# EAGLE board Digital_Temperature_Sensor_Breakout_-_TMP102_Panel_v13 (EAGLE 7.5.0), part 1 of 4
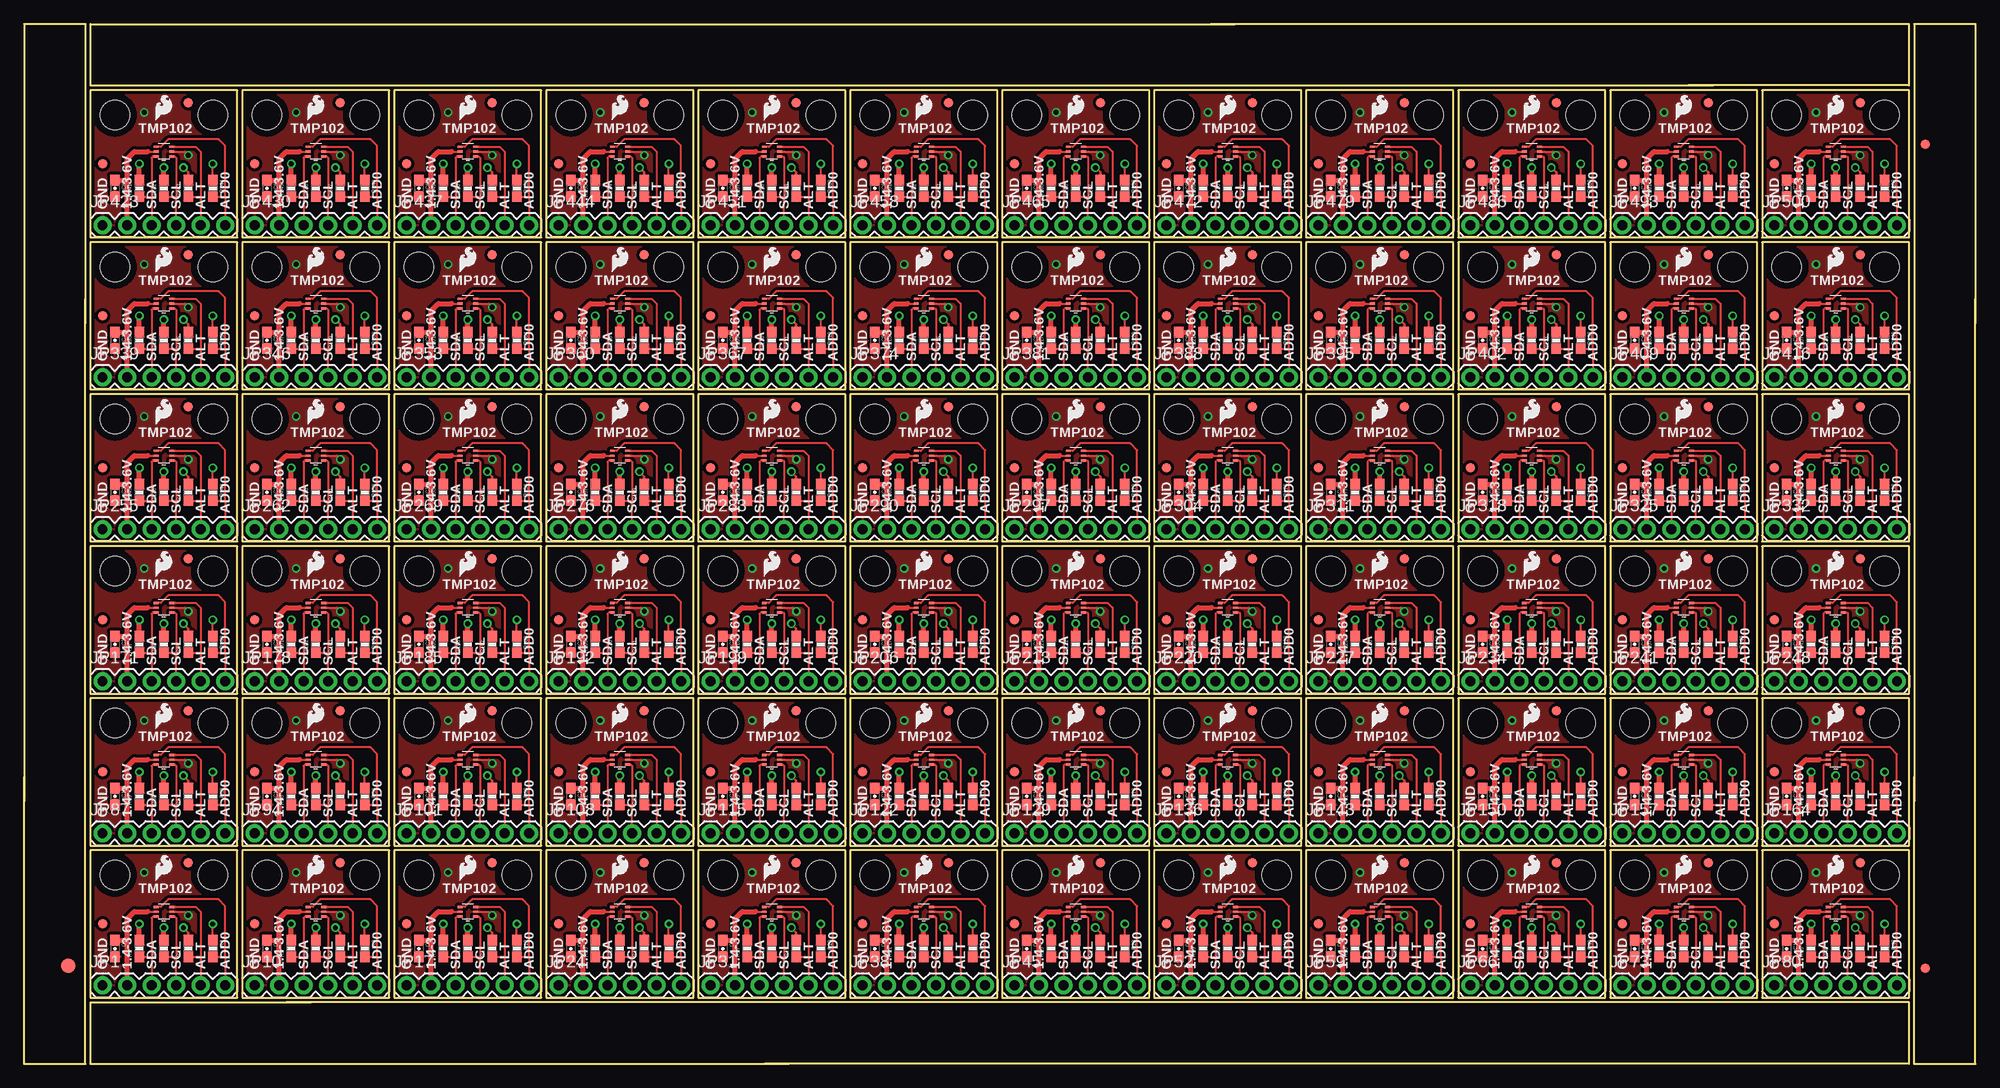
[diagram p0: board, top side]
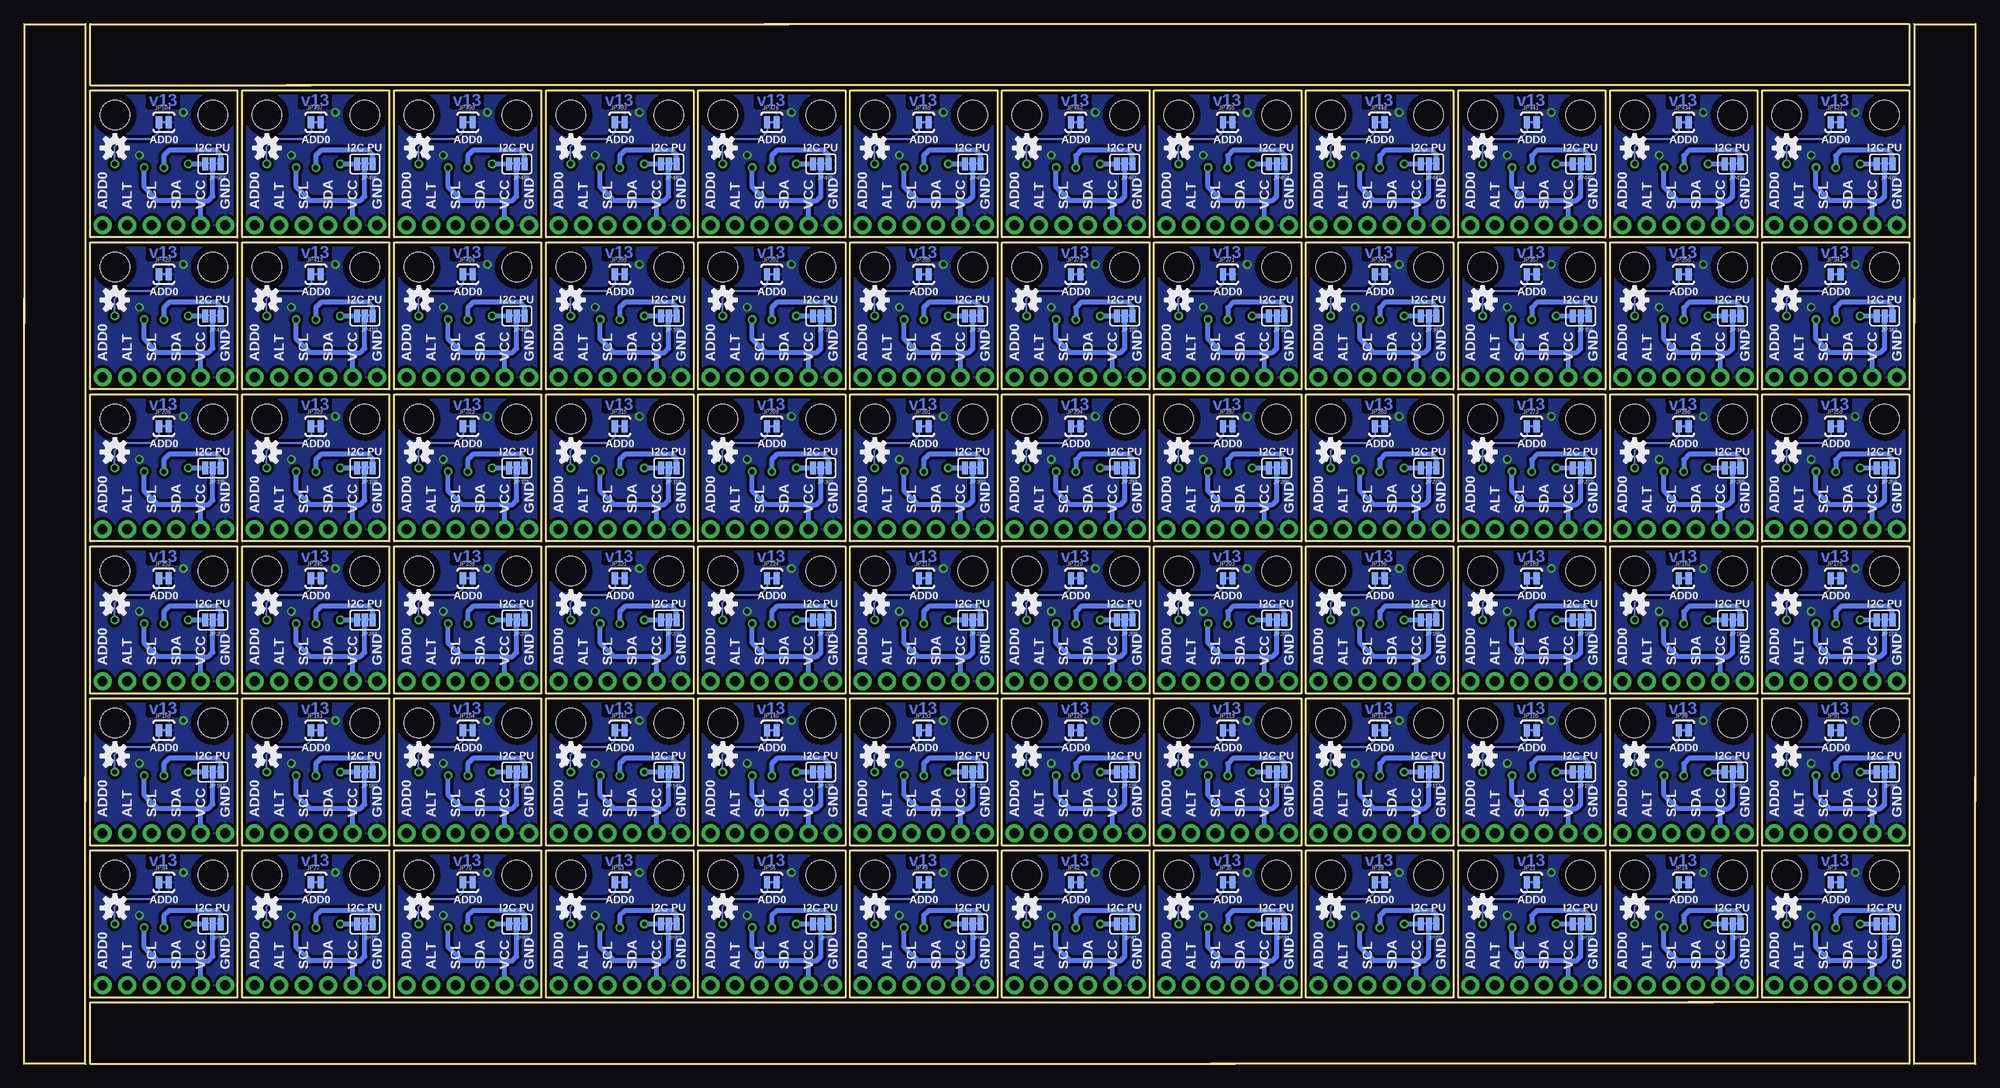
[diagram p1: board, bottom side, seen from below]

Size 202.18 x 107.7 mm. Coordinates in mm from the lower left corner, seen from the top.
Outline: 312 segments
Copper layers (1*16): Top 0.035mm / dielectric 1.5mm / Bottom 0.035mm
Design rules "SparkFun-2-layer-TIGHT": minimum track width 7mil, minimum drill 15mil, track to track 7mil, track to pad 7mil, pad to pad 7mil, via to via 7mil, smd to smd 7mil, copper to edge 7mil, drill to drill 7mil, minimum pad ring 7mil, minimum via ring 7mil, stop-mask expansion 4mil, vias tented up to drill 25mil, thermal gap 10mil

## Footprints (pad centres in the part's own frame; a part is rotated, then mirrored left to right if it is on the bottom)
0603-CAP = smd 1.1 x 1: 1 -0.85,0; 2 0.85,0
FIDUCIAL-1.5X3 = smd 1.5 x 1.5: 1 0,0
FIDUCIAL-1X2 = smd 1 x 1: 1 0,0
1X06 = drill 1.016 pad 1.88: 1 0,0; 2 2.54,0; 3 5.08,0; 4 7.62,0; 5 10.16,0; 6 12.7,0
PAD-JUMPER-3-3OF3_NC_BY_TRACE_YES_SILK_FULL_BOX = smd 0.635 x 1.27: 1 -0.813,0; 2 0,0; 3 0.813,0
PAD-JUMPER-2-NC_BY_TRACE_YES_SILK = smd 0.635 x 1.27: 1 -0.508,0; 2 0.508,0
STAND-OFF-TIGHT = hole 3.048: 0,0
0603-RES = smd 1.1 x 1: 1 -0.85,0; 2 0.85,0
SOT563-2 = smd 0.508 x 0.249: 1 -0.8,0.498; 2 -0.8,0.003; 3 -0.8,-0.506; 4 0.776,-0.506; 5 0.776,0.003; 6 0.776,0.498

## Placement (x,y rotation side)
C1  0.1uF  [0603-CAP]  9.4,11.94 270 top
C2  0.1uF  [0603-CAP]  25.15,11.94 270 top
C3  0.1uF  [0603-CAP]  40.89,11.94 270 top
C4  0.1uF  [0603-CAP]  56.64,11.94 270 top
C5  0.1uF  [0603-CAP]  72.39,11.94 270 top
C6  0.1uF  [0603-CAP]  88.14,11.94 270 top
C7  0.1uF  [0603-CAP]  103.89,11.94 270 top
C8  0.1uF  [0603-CAP]  119.63,11.94 270 top
C9  0.1uF  [0603-CAP]  135.38,11.94 270 top
C10  0.1uF  [0603-CAP]  151.13,11.94 270 top
C11  0.1uF  [0603-CAP]  166.88,11.94 270 top
C12  0.1uF  [0603-CAP]  182.63,11.94 270 top
C13  0.1uF  [0603-CAP]  9.4,27.69 270 top
C14  0.1uF  [0603-CAP]  25.15,27.69 270 top
C15  0.1uF  [0603-CAP]  40.89,27.69 270 top
C16  0.1uF  [0603-CAP]  56.64,27.69 270 top
C17  0.1uF  [0603-CAP]  72.39,27.69 270 top
C18  0.1uF  [0603-CAP]  88.14,27.69 270 top
C19  0.1uF  [0603-CAP]  103.89,27.69 270 top
C20  0.1uF  [0603-CAP]  119.63,27.69 270 top
C21  0.1uF  [0603-CAP]  135.38,27.69 270 top
C22  0.1uF  [0603-CAP]  151.13,27.69 270 top
C23  0.1uF  [0603-CAP]  166.88,27.69 270 top
C24  0.1uF  [0603-CAP]  182.63,27.69 270 top
C25  0.1uF  [0603-CAP]  9.4,43.43 270 top
C26  0.1uF  [0603-CAP]  25.15,43.43 270 top
C27  0.1uF  [0603-CAP]  40.89,43.43 270 top
C28  0.1uF  [0603-CAP]  56.64,43.43 270 top
C29  0.1uF  [0603-CAP]  72.39,43.43 270 top
C30  0.1uF  [0603-CAP]  88.14,43.43 270 top
C31  0.1uF  [0603-CAP]  103.89,43.43 270 top
C32  0.1uF  [0603-CAP]  119.63,43.43 270 top
C33  0.1uF  [0603-CAP]  135.38,43.43 270 top
C34  0.1uF  [0603-CAP]  151.13,43.43 270 top
C35  0.1uF  [0603-CAP]  166.88,43.43 270 top
C36  0.1uF  [0603-CAP]  182.63,43.43 270 top
C37  0.1uF  [0603-CAP]  9.4,59.18 270 top
C38  0.1uF  [0603-CAP]  25.15,59.18 270 top
C39  0.1uF  [0603-CAP]  40.89,59.18 270 top
C40  0.1uF  [0603-CAP]  56.64,59.18 270 top
C41  0.1uF  [0603-CAP]  72.39,59.18 270 top
C42  0.1uF  [0603-CAP]  88.14,59.18 270 top
C43  0.1uF  [0603-CAP]  103.89,59.18 270 top
C44  0.1uF  [0603-CAP]  119.63,59.18 270 top
C45  0.1uF  [0603-CAP]  135.38,59.18 270 top
C46  0.1uF  [0603-CAP]  151.13,59.18 270 top
C47  0.1uF  [0603-CAP]  166.88,59.18 270 top
C48  0.1uF  [0603-CAP]  182.63,59.18 270 top
C49  0.1uF  [0603-CAP]  9.4,74.93 270 top
C50  0.1uF  [0603-CAP]  25.15,74.93 270 top
C51  0.1uF  [0603-CAP]  40.89,74.93 270 top
C52  0.1uF  [0603-CAP]  56.64,74.93 270 top
C53  0.1uF  [0603-CAP]  72.39,74.93 270 top
C54  0.1uF  [0603-CAP]  88.14,74.93 270 top
C55  0.1uF  [0603-CAP]  103.89,74.93 270 top
C56  0.1uF  [0603-CAP]  119.63,74.93 270 top
C57  0.1uF  [0603-CAP]  135.38,74.93 270 top
C58  0.1uF  [0603-CAP]  151.13,74.93 270 top
C59  0.1uF  [0603-CAP]  166.88,74.93 270 top
C60  0.1uF  [0603-CAP]  182.63,74.93 270 top
C61  0.1uF  [0603-CAP]  9.4,90.68 270 top
C62  0.1uF  [0603-CAP]  25.15,90.68 270 top
C63  0.1uF  [0603-CAP]  40.89,90.68 270 top
C64  0.1uF  [0603-CAP]  56.64,90.68 270 top
C65  0.1uF  [0603-CAP]  72.39,90.68 270 top
C66  0.1uF  [0603-CAP]  88.14,90.68 270 top
C67  0.1uF  [0603-CAP]  103.89,90.68 270 top
C68  0.1uF  [0603-CAP]  119.63,90.68 270 top
C69  0.1uF  [0603-CAP]  135.38,90.68 270 top
C70  0.1uF  [0603-CAP]  151.13,90.68 270 top
C71  0.1uF  [0603-CAP]  166.88,90.68 270 top
C72  0.1uF  [0603-CAP]  182.63,90.68 270 top
E$1  [FIDUCIAL-1.5X3]  4.57,10.16 0 top
E$2  [FIDUCIAL-1X2]  196.98,95.25 0 top
E$5  [FIDUCIAL-1X2]  196.98,9.91 0 top
JP1  [1X06]  8.13,8.13 0 top
JP2  [PAD-JUMPER-3-3OF3_NC_BY_TRACE_YES_SILK_FULL_BOX]  9.4,14.48 180 bottom
JP3  ADD0  [PAD-JUMPER-2-NC_BY_TRACE_YES_SILK]  14.48,18.8 0 bottom
JP4  FIDUCIAL1X2  [FIDUCIAL-1X2]  23.88,14.48 0 top
JP5  FIDUCIAL1X2  [FIDUCIAL-1X2]  8.13,14.48 0 top
JP6  FIDUCIAL1X2  [FIDUCIAL-1X2]  17.02,20.83 0 top
JP7  STAND-OFFTIGHT  [STAND-OFF-TIGHT]  9.4,19.56 0 top
JP8  STAND-OFFTIGHT  [STAND-OFF-TIGHT]  19.56,19.56 0 top
JP9  FIDUCIAL1X2  [FIDUCIAL-1X2]  32.77,20.83 0 top
JP10  [1X06]  23.88,8.13 0 top
JP11  STAND-OFFTIGHT  [STAND-OFF-TIGHT]  25.15,19.56 0 top
JP12  STAND-OFFTIGHT  [STAND-OFF-TIGHT]  35.31,19.56 0 top
JP13  [PAD-JUMPER-3-3OF3_NC_BY_TRACE_YES_SILK_FULL_BOX]  25.15,14.48 180 bottom
JP14  ADD0  [PAD-JUMPER-2-NC_BY_TRACE_YES_SILK]  30.23,18.8 0 bottom
JP15  FIDUCIAL1X2  [FIDUCIAL-1X2]  39.62,14.48 0 top
JP16  FIDUCIAL1X2  [FIDUCIAL-1X2]  48.51,20.83 0 top
JP17  [1X06]  39.62,8.13 0 top
JP18  STAND-OFFTIGHT  [STAND-OFF-TIGHT]  40.89,19.56 0 top
JP19  STAND-OFFTIGHT  [STAND-OFF-TIGHT]  51.05,19.56 0 top
JP20  [PAD-JUMPER-3-3OF3_NC_BY_TRACE_YES_SILK_FULL_BOX]  40.89,14.48 180 bottom
JP21  ADD0  [PAD-JUMPER-2-NC_BY_TRACE_YES_SILK]  45.97,18.8 0 bottom
JP22  FIDUCIAL1X2  [FIDUCIAL-1X2]  55.37,14.48 0 top
JP23  FIDUCIAL1X2  [FIDUCIAL-1X2]  64.26,20.83 0 top
JP24  [1X06]  55.37,8.13 0 top
JP25  STAND-OFFTIGHT  [STAND-OFF-TIGHT]  56.64,19.56 0 top
JP26  STAND-OFFTIGHT  [STAND-OFF-TIGHT]  66.8,19.56 0 top
JP27  [PAD-JUMPER-3-3OF3_NC_BY_TRACE_YES_SILK_FULL_BOX]  56.64,14.48 180 bottom
JP28  ADD0  [PAD-JUMPER-2-NC_BY_TRACE_YES_SILK]  61.72,18.8 0 bottom
JP29  FIDUCIAL1X2  [FIDUCIAL-1X2]  71.12,14.48 0 top
JP30  FIDUCIAL1X2  [FIDUCIAL-1X2]  80.01,20.83 0 top
JP31  [1X06]  71.12,8.13 0 top
JP32  STAND-OFFTIGHT  [STAND-OFF-TIGHT]  72.39,19.56 0 top
JP33  STAND-OFFTIGHT  [STAND-OFF-TIGHT]  82.55,19.56 0 top
JP34  [PAD-JUMPER-3-3OF3_NC_BY_TRACE_YES_SILK_FULL_BOX]  72.39,14.48 180 bottom
JP35  ADD0  [PAD-JUMPER-2-NC_BY_TRACE_YES_SILK]  77.47,18.8 0 bottom
JP36  FIDUCIAL1X2  [FIDUCIAL-1X2]  86.87,14.48 0 top
JP37  FIDUCIAL1X2  [FIDUCIAL-1X2]  95.76,20.83 0 top
JP38  [1X06]  86.87,8.13 0 top
JP39  STAND-OFFTIGHT  [STAND-OFF-TIGHT]  88.14,19.56 0 top
JP40  STAND-OFFTIGHT  [STAND-OFF-TIGHT]  98.3,19.56 0 top
JP41  [PAD-JUMPER-3-3OF3_NC_BY_TRACE_YES_SILK_FULL_BOX]  88.14,14.48 180 bottom
JP42  ADD0  [PAD-JUMPER-2-NC_BY_TRACE_YES_SILK]  93.22,18.8 0 bottom
JP43  FIDUCIAL1X2  [FIDUCIAL-1X2]  102.62,14.48 0 top
JP44  FIDUCIAL1X2  [FIDUCIAL-1X2]  111.51,20.83 0 top
JP45  [1X06]  102.62,8.13 0 top
JP46  STAND-OFFTIGHT  [STAND-OFF-TIGHT]  103.89,19.56 0 top
JP47  STAND-OFFTIGHT  [STAND-OFF-TIGHT]  114.05,19.56 0 top
JP48  [PAD-JUMPER-3-3OF3_NC_BY_TRACE_YES_SILK_FULL_BOX]  103.89,14.48 180 bottom
JP49  ADD0  [PAD-JUMPER-2-NC_BY_TRACE_YES_SILK]  108.97,18.8 0 bottom
JP50  FIDUCIAL1X2  [FIDUCIAL-1X2]  118.36,14.48 0 top
JP51  FIDUCIAL1X2  [FIDUCIAL-1X2]  127.25,20.83 0 top
JP52  [1X06]  118.36,8.13 0 top
JP53  STAND-OFFTIGHT  [STAND-OFF-TIGHT]  119.63,19.56 0 top
JP54  STAND-OFFTIGHT  [STAND-OFF-TIGHT]  129.79,19.56 0 top
JP55  [PAD-JUMPER-3-3OF3_NC_BY_TRACE_YES_SILK_FULL_BOX]  119.63,14.48 180 bottom
JP56  ADD0  [PAD-JUMPER-2-NC_BY_TRACE_YES_SILK]  124.71,18.8 0 bottom
JP57  FIDUCIAL1X2  [FIDUCIAL-1X2]  134.11,14.48 0 top
JP58  FIDUCIAL1X2  [FIDUCIAL-1X2]  143,20.83 0 top
JP59  [1X06]  134.11,8.13 0 top
JP60  STAND-OFFTIGHT  [STAND-OFF-TIGHT]  135.38,19.56 0 top
JP61  STAND-OFFTIGHT  [STAND-OFF-TIGHT]  145.54,19.56 0 top
JP62  [PAD-JUMPER-3-3OF3_NC_BY_TRACE_YES_SILK_FULL_BOX]  135.38,14.48 180 bottom
JP63  ADD0  [PAD-JUMPER-2-NC_BY_TRACE_YES_SILK]  140.46,18.8 0 bottom
JP64  FIDUCIAL1X2  [FIDUCIAL-1X2]  149.86,14.48 0 top
JP65  FIDUCIAL1X2  [FIDUCIAL-1X2]  158.75,20.83 0 top
JP66  [1X06]  149.86,8.13 0 top
JP67  STAND-OFFTIGHT  [STAND-OFF-TIGHT]  151.13,19.56 0 top
JP68  STAND-OFFTIGHT  [STAND-OFF-TIGHT]  161.29,19.56 0 top
JP69  [PAD-JUMPER-3-3OF3_NC_BY_TRACE_YES_SILK_FULL_BOX]  151.13,14.48 180 bottom
JP70  ADD0  [PAD-JUMPER-2-NC_BY_TRACE_YES_SILK]  156.21,18.8 0 bottom
JP71  FIDUCIAL1X2  [FIDUCIAL-1X2]  165.61,14.48 0 top
JP72  FIDUCIAL1X2  [FIDUCIAL-1X2]  174.5,20.83 0 top
JP73  [1X06]  165.61,8.13 0 top
JP74  STAND-OFFTIGHT  [STAND-OFF-TIGHT]  166.88,19.56 0 top
JP75  STAND-OFFTIGHT  [STAND-OFF-TIGHT]  177.04,19.56 0 top
JP76  [PAD-JUMPER-3-3OF3_NC_BY_TRACE_YES_SILK_FULL_BOX]  166.88,14.48 180 bottom
JP77  ADD0  [PAD-JUMPER-2-NC_BY_TRACE_YES_SILK]  171.96,18.8 0 bottom
JP78  FIDUCIAL1X2  [FIDUCIAL-1X2]  181.36,14.48 0 top
JP79  FIDUCIAL1X2  [FIDUCIAL-1X2]  190.25,20.83 0 top
JP80  [1X06]  181.36,8.13 0 top
JP81  STAND-OFFTIGHT  [STAND-OFF-TIGHT]  182.63,19.56 0 top
JP82  STAND-OFFTIGHT  [STAND-OFF-TIGHT]  192.79,19.56 0 top
JP83  [PAD-JUMPER-3-3OF3_NC_BY_TRACE_YES_SILK_FULL_BOX]  182.63,14.48 180 bottom
JP84  ADD0  [PAD-JUMPER-2-NC_BY_TRACE_YES_SILK]  187.71,18.8 0 bottom
JP85  FIDUCIAL1X2  [FIDUCIAL-1X2]  8.13,30.23 0 top
JP86  FIDUCIAL1X2  [FIDUCIAL-1X2]  17.02,36.58 0 top
JP87  [1X06]  8.13,23.88 0 top
JP88  STAND-OFFTIGHT  [STAND-OFF-TIGHT]  9.4,35.31 0 top
JP89  STAND-OFFTIGHT  [STAND-OFF-TIGHT]  19.56,35.31 0 top
JP90  [PAD-JUMPER-3-3OF3_NC_BY_TRACE_YES_SILK_FULL_BOX]  9.4,30.23 180 bottom
JP91  ADD0  [PAD-JUMPER-2-NC_BY_TRACE_YES_SILK]  14.48,34.54 0 bottom
JP92  FIDUCIAL1X2  [FIDUCIAL-1X2]  23.88,30.23 0 top
JP93  FIDUCIAL1X2  [FIDUCIAL-1X2]  32.77,36.58 0 top
JP94  [1X06]  23.88,23.88 0 top
JP95  STAND-OFFTIGHT  [STAND-OFF-TIGHT]  25.15,35.31 0 top
JP96  STAND-OFFTIGHT  [STAND-OFF-TIGHT]  35.31,35.31 0 top
JP97  [PAD-JUMPER-3-3OF3_NC_BY_TRACE_YES_SILK_FULL_BOX]  25.15,30.23 180 bottom
JP98  ADD0  [PAD-JUMPER-2-NC_BY_TRACE_YES_SILK]  30.23,34.54 0 bottom
JP99  FIDUCIAL1X2  [FIDUCIAL-1X2]  39.62,30.23 0 top
JP100  FIDUCIAL1X2  [FIDUCIAL-1X2]  48.51,36.58 0 top
JP101  [1X06]  39.62,23.88 0 top
JP102  STAND-OFFTIGHT  [STAND-OFF-TIGHT]  40.89,35.31 0 top
JP103  STAND-OFFTIGHT  [STAND-OFF-TIGHT]  51.05,35.31 0 top
JP104  [PAD-JUMPER-3-3OF3_NC_BY_TRACE_YES_SILK_FULL_BOX]  40.89,30.23 180 bottom
JP105  ADD0  [PAD-JUMPER-2-NC_BY_TRACE_YES_SILK]  45.97,34.54 0 bottom
JP106  FIDUCIAL1X2  [FIDUCIAL-1X2]  55.37,30.23 0 top
JP107  FIDUCIAL1X2  [FIDUCIAL-1X2]  64.26,36.58 0 top
JP108  [1X06]  55.37,23.88 0 top
JP109  STAND-OFFTIGHT  [STAND-OFF-TIGHT]  56.64,35.31 0 top
JP110  STAND-OFFTIGHT  [STAND-OFF-TIGHT]  66.8,35.31 0 top
JP111  [PAD-JUMPER-3-3OF3_NC_BY_TRACE_YES_SILK_FULL_BOX]  56.64,30.23 180 bottom
JP112  ADD0  [PAD-JUMPER-2-NC_BY_TRACE_YES_SILK]  61.72,34.54 0 bottom
JP113  FIDUCIAL1X2  [FIDUCIAL-1X2]  71.12,30.23 0 top
JP114  FIDUCIAL1X2  [FIDUCIAL-1X2]  80.01,36.58 0 top
JP115  [1X06]  71.12,23.88 0 top
JP116  STAND-OFFTIGHT  [STAND-OFF-TIGHT]  72.39,35.31 0 top
JP117  STAND-OFFTIGHT  [STAND-OFF-TIGHT]  82.55,35.31 0 top
JP118  [PAD-JUMPER-3-3OF3_NC_BY_TRACE_YES_SILK_FULL_BOX]  72.39,30.23 180 bottom
JP119  ADD0  [PAD-JUMPER-2-NC_BY_TRACE_YES_SILK]  77.47,34.54 0 bottom
JP120  FIDUCIAL1X2  [FIDUCIAL-1X2]  86.87,30.23 0 top
JP121  FIDUCIAL1X2  [FIDUCIAL-1X2]  95.76,36.58 0 top
JP122  [1X06]  86.87,23.88 0 top
JP123  STAND-OFFTIGHT  [STAND-OFF-TIGHT]  88.14,35.31 0 top
JP124  STAND-OFFTIGHT  [STAND-OFF-TIGHT]  98.3,35.31 0 top
JP125  [PAD-JUMPER-3-3OF3_NC_BY_TRACE_YES_SILK_FULL_BOX]  88.14,30.23 180 bottom
JP126  ADD0  [PAD-JUMPER-2-NC_BY_TRACE_YES_SILK]  93.22,34.54 0 bottom
JP127  FIDUCIAL1X2  [FIDUCIAL-1X2]  102.62,30.23 0 top
JP128  FIDUCIAL1X2  [FIDUCIAL-1X2]  111.51,36.58 0 top
JP129  [1X06]  102.62,23.88 0 top
JP130  STAND-OFFTIGHT  [STAND-OFF-TIGHT]  103.89,35.31 0 top
JP131  STAND-OFFTIGHT  [STAND-OFF-TIGHT]  114.05,35.31 0 top
JP132  [PAD-JUMPER-3-3OF3_NC_BY_TRACE_YES_SILK_FULL_BOX]  103.89,30.23 180 bottom
JP133  ADD0  [PAD-JUMPER-2-NC_BY_TRACE_YES_SILK]  108.97,34.54 0 bottom
JP134  FIDUCIAL1X2  [FIDUCIAL-1X2]  118.36,30.23 0 top
JP135  FIDUCIAL1X2  [FIDUCIAL-1X2]  127.25,36.58 0 top
JP136  [1X06]  118.36,23.88 0 top
JP137  STAND-OFFTIGHT  [STAND-OFF-TIGHT]  119.63,35.31 0 top
JP138  STAND-OFFTIGHT  [STAND-OFF-TIGHT]  129.79,35.31 0 top
JP139  [PAD-JUMPER-3-3OF3_NC_BY_TRACE_YES_SILK_FULL_BOX]  119.63,30.23 180 bottom
JP140  ADD0  [PAD-JUMPER-2-NC_BY_TRACE_YES_SILK]  124.71,34.54 0 bottom
JP141  FIDUCIAL1X2  [FIDUCIAL-1X2]  134.11,30.23 0 top
JP142  FIDUCIAL1X2  [FIDUCIAL-1X2]  143,36.58 0 top
JP143  [1X06]  134.11,23.88 0 top
JP144  STAND-OFFTIGHT  [STAND-OFF-TIGHT]  135.38,35.31 0 top
JP145  STAND-OFFTIGHT  [STAND-OFF-TIGHT]  145.54,35.31 0 top
JP146  [PAD-JUMPER-3-3OF3_NC_BY_TRACE_YES_SILK_FULL_BOX]  135.38,30.23 180 bottom
JP147  ADD0  [PAD-JUMPER-2-NC_BY_TRACE_YES_SILK]  140.46,34.54 0 bottom
JP148  FIDUCIAL1X2  [FIDUCIAL-1X2]  149.86,30.23 0 top
JP149  FIDUCIAL1X2  [FIDUCIAL-1X2]  158.75,36.58 0 top
JP150  [1X06]  149.86,23.88 0 top
JP151  STAND-OFFTIGHT  [STAND-OFF-TIGHT]  151.13,35.31 0 top
JP152  STAND-OFFTIGHT  [STAND-OFF-TIGHT]  161.29,35.31 0 top
JP153  [PAD-JUMPER-3-3OF3_NC_BY_TRACE_YES_SILK_FULL_BOX]  151.13,30.23 180 bottom
JP154  ADD0  [PAD-JUMPER-2-NC_BY_TRACE_YES_SILK]  156.21,34.54 0 bottom
JP155  FIDUCIAL1X2  [FIDUCIAL-1X2]  165.61,30.23 0 top
JP156  FIDUCIAL1X2  [FIDUCIAL-1X2]  174.5,36.58 0 top
JP157  [1X06]  165.61,23.88 0 top
JP158  STAND-OFFTIGHT  [STAND-OFF-TIGHT]  166.88,35.31 0 top
JP159  STAND-OFFTIGHT  [STAND-OFF-TIGHT]  177.04,35.31 0 top
JP160  [PAD-JUMPER-3-3OF3_NC_BY_TRACE_YES_SILK_FULL_BOX]  166.88,30.23 180 bottom
JP161  ADD0  [PAD-JUMPER-2-NC_BY_TRACE_YES_SILK]  171.96,34.54 0 bottom
JP162  FIDUCIAL1X2  [FIDUCIAL-1X2]  181.36,30.23 0 top
JP163  FIDUCIAL1X2  [FIDUCIAL-1X2]  190.25,36.58 0 top
JP164  [1X06]  181.36,23.88 0 top
JP165  STAND-OFFTIGHT  [STAND-OFF-TIGHT]  182.63,35.31 0 top
JP166  STAND-OFFTIGHT  [STAND-OFF-TIGHT]  192.79,35.31 0 top
JP167  [PAD-JUMPER-3-3OF3_NC_BY_TRACE_YES_SILK_FULL_BOX]  182.63,30.23 180 bottom
JP168  ADD0  [PAD-JUMPER-2-NC_BY_TRACE_YES_SILK]  187.71,34.54 0 bottom
JP169  FIDUCIAL1X2  [FIDUCIAL-1X2]  8.13,45.97 0 top
JP170  FIDUCIAL1X2  [FIDUCIAL-1X2]  17.02,52.32 0 top
JP171  [1X06]  8.13,39.62 0 top
JP172  STAND-OFFTIGHT  [STAND-OFF-TIGHT]  9.4,51.05 0 top
JP173  STAND-OFFTIGHT  [STAND-OFF-TIGHT]  19.56,51.05 0 top
JP174  [PAD-JUMPER-3-3OF3_NC_BY_TRACE_YES_SILK_FULL_BOX]  9.4,45.97 180 bottom
JP175  ADD0  [PAD-JUMPER-2-NC_BY_TRACE_YES_SILK]  14.48,50.29 0 bottom
JP176  FIDUCIAL1X2  [FIDUCIAL-1X2]  23.88,45.97 0 top
JP177  FIDUCIAL1X2  [FIDUCIAL-1X2]  32.77,52.32 0 top
JP178  [1X06]  23.88,39.62 0 top
JP179  STAND-OFFTIGHT  [STAND-OFF-TIGHT]  25.15,51.05 0 top
JP180  STAND-OFFTIGHT  [STAND-OFF-TIGHT]  35.31,51.05 0 top
JP181  [PAD-JUMPER-3-3OF3_NC_BY_TRACE_YES_SILK_FULL_BOX]  25.15,45.97 180 bottom
JP182  ADD0  [PAD-JUMPER-2-NC_BY_TRACE_YES_SILK]  30.23,50.29 0 bottom
JP183  FIDUCIAL1X2  [FIDUCIAL-1X2]  39.62,45.97 0 top
JP184  FIDUCIAL1X2  [FIDUCIAL-1X2]  48.51,52.32 0 top
JP185  [1X06]  39.62,39.62 0 top
JP186  STAND-OFFTIGHT  [STAND-OFF-TIGHT]  40.89,51.05 0 top
JP187  STAND-OFFTIGHT  [STAND-OFF-TIGHT]  51.05,51.05 0 top
JP188  [PAD-JUMPER-3-3OF3_NC_BY_TRACE_YES_SILK_FULL_BOX]  40.89,45.97 180 bottom
JP189  ADD0  [PAD-JUMPER-2-NC_BY_TRACE_YES_SILK]  45.97,50.29 0 bottom
JP190  FIDUCIAL1X2  [FIDUCIAL-1X2]  55.37,45.97 0 top
JP191  FIDUCIAL1X2  [FIDUCIAL-1X2]  64.26,52.32 0 top
JP192  [1X06]  55.37,39.62 0 top
JP193  STAND-OFFTIGHT  [STAND-OFF-TIGHT]  56.64,51.05 0 top
JP194  STAND-OFFTIGHT  [STAND-OFF-TIGHT]  66.8,51.05 0 top
JP195  [PAD-JUMPER-3-3OF3_NC_BY_TRACE_YES_SILK_FULL_BOX]  56.64,45.97 180 bottom
JP196  ADD0  [PAD-JUMPER-2-NC_BY_TRACE_YES_SILK]  61.72,50.29 0 bottom
JP197  FIDUCIAL1X2  [FIDUCIAL-1X2]  71.12,45.97 0 top
JP198  FIDUCIAL1X2  [FIDUCIAL-1X2]  80.01,52.32 0 top
JP199  [1X06]  71.12,39.62 0 top
JP200  STAND-OFFTIGHT  [STAND-OFF-TIGHT]  72.39,51.05 0 top
JP201  STAND-OFFTIGHT  [STAND-OFF-TIGHT]  82.55,51.05 0 top
JP202  [PAD-JUMPER-3-3OF3_NC_BY_TRACE_YES_SILK_FULL_BOX]  72.39,45.97 180 bottom
JP203  ADD0  [PAD-JUMPER-2-NC_BY_TRACE_YES_SILK]  77.47,50.29 0 bottom
JP204  FIDUCIAL1X2  [FIDUCIAL-1X2]  86.87,45.97 0 top
JP205  FIDUCIAL1X2  [FIDUCIAL-1X2]  95.76,52.32 0 top
JP206  [1X06]  86.87,39.62 0 top
JP207  STAND-OFFTIGHT  [STAND-OFF-TIGHT]  88.14,51.05 0 top
JP208  STAND-OFFTIGHT  [STAND-OFF-TIGHT]  98.3,51.05 0 top
JP209  [PAD-JUMPER-3-3OF3_NC_BY_TRACE_YES_SILK_FULL_BOX]  88.14,45.97 180 bottom
JP210  ADD0  [PAD-JUMPER-2-NC_BY_TRACE_YES_SILK]  93.22,50.29 0 bottom
JP211  FIDUCIAL1X2  [FIDUCIAL-1X2]  102.62,45.97 0 top
JP212  FIDUCIAL1X2  [FIDUCIAL-1X2]  111.51,52.32 0 top
JP213  [1X06]  102.62,39.62 0 top
JP214  STAND-OFFTIGHT  [STAND-OFF-TIGHT]  103.89,51.05 0 top
JP215  STAND-OFFTIGHT  [STAND-OFF-TIGHT]  114.05,51.05 0 top
JP216  [PAD-JUMPER-3-3OF3_NC_BY_TRACE_YES_SILK_FULL_BOX]  103.89,45.97 180 bottom
JP217  ADD0  [PAD-JUMPER-2-NC_BY_TRACE_YES_SILK]  108.97,50.29 0 bottom
JP218  FIDUCIAL1X2  [FIDUCIAL-1X2]  118.36,45.97 0 top
JP219  FIDUCIAL1X2  [FIDUCIAL-1X2]  127.25,52.32 0 top
JP220  [1X06]  118.36,39.62 0 top
JP221  STAND-OFFTIGHT  [STAND-OFF-TIGHT]  119.63,51.05 0 top
JP222  STAND-OFFTIGHT  [STAND-OFF-TIGHT]  129.79,51.05 0 top
JP223  [PAD-JUMPER-3-3OF3_NC_BY_TRACE_YES_SILK_FULL_BOX]  119.63,45.97 180 bottom
JP224  ADD0  [PAD-JUMPER-2-NC_BY_TRACE_YES_SILK]  124.71,50.29 0 bottom
JP225  FIDUCIAL1X2  [FIDUCIAL-1X2]  134.11,45.97 0 top
JP226  FIDUCIAL1X2  [FIDUCIAL-1X2]  143,52.32 0 top
JP227  [1X06]  134.11,39.62 0 top
JP228  STAND-OFFTIGHT  [STAND-OFF-TIGHT]  135.38,51.05 0 top
JP229  STAND-OFFTIGHT  [STAND-OFF-TIGHT]  145.54,51.05 0 top
JP230  [PAD-JUMPER-3-3OF3_NC_BY_TRACE_YES_SILK_FULL_BOX]  135.38,45.97 180 bottom
JP231  ADD0  [PAD-JUMPER-2-NC_BY_TRACE_YES_SILK]  140.46,50.29 0 bottom
JP232  FIDUCIAL1X2  [FIDUCIAL-1X2]  149.86,45.97 0 top
JP233  FIDUCIAL1X2  [FIDUCIAL-1X2]  158.75,52.32 0 top
JP234  [1X06]  149.86,39.62 0 top
JP235  STAND-OFFTIGHT  [STAND-OFF-TIGHT]  151.13,51.05 0 top
JP236  STAND-OFFTIGHT  [STAND-OFF-TIGHT]  161.29,51.05 0 top
JP237  [PAD-JUMPER-3-3OF3_NC_BY_TRACE_YES_SILK_FULL_BOX]  151.13,45.97 180 bottom
JP238  ADD0  [PAD-JUMPER-2-NC_BY_TRACE_YES_SILK]  156.21,50.29 0 bottom
JP239  FIDUCIAL1X2  [FIDUCIAL-1X2]  165.61,45.97 0 top
JP240  FIDUCIAL1X2  [FIDUCIAL-1X2]  174.5,52.32 0 top
JP241  [1X06]  165.61,39.62 0 top
JP242  STAND-OFFTIGHT  [STAND-OFF-TIGHT]  166.88,51.05 0 top
JP243  STAND-OFFTIGHT  [STAND-OFF-TIGHT]  177.04,51.05 0 top
JP244  [PAD-JUMPER-3-3OF3_NC_BY_TRACE_YES_SILK_FULL_BOX]  166.88,45.97 180 bottom
JP245  ADD0  [PAD-JUMPER-2-NC_BY_TRACE_YES_SILK]  171.96,50.29 0 bottom
JP246  FIDUCIAL1X2  [FIDUCIAL-1X2]  181.36,45.97 0 top
JP247  FIDUCIAL1X2  [FIDUCIAL-1X2]  190.25,52.32 0 top
JP248  [1X06]  181.36,39.62 0 top
JP249  STAND-OFFTIGHT  [STAND-OFF-TIGHT]  182.63,51.05 0 top
JP250  STAND-OFFTIGHT  [STAND-OFF-TIGHT]  192.79,51.05 0 top
JP251  [PAD-JUMPER-3-3OF3_NC_BY_TRACE_YES_SILK_FULL_BOX]  182.63,45.97 180 bottom
JP252  ADD0  [PAD-JUMPER-2-NC_BY_TRACE_YES_SILK]  187.71,50.29 0 bottom
JP253  FIDUCIAL1X2  [FIDUCIAL-1X2]  8.13,61.72 0 top
JP254  FIDUCIAL1X2  [FIDUCIAL-1X2]  17.02,68.07 0 top
JP255  [1X06]  8.13,55.37 0 top
JP256  STAND-OFFTIGHT  [STAND-OFF-TIGHT]  9.4,66.8 0 top
JP257  STAND-OFFTIGHT  [STAND-OFF-TIGHT]  19.56,66.8 0 top
JP258  [PAD-JUMPER-3-3OF3_NC_BY_TRACE_YES_SILK_FULL_BOX]  9.4,61.72 180 bottom
JP259  ADD0  [PAD-JUMPER-2-NC_BY_TRACE_YES_SILK]  14.48,66.04 0 bottom
JP260  FIDUCIAL1X2  [FIDUCIAL-1X2]  23.88,61.72 0 top
JP261  FIDUCIAL1X2  [FIDUCIAL-1X2]  32.77,68.07 0 top
JP262  [1X06]  23.88,55.37 0 top
JP263  STAND-OFFTIGHT  [STAND-OFF-TIGHT]  25.15,66.8 0 top
JP264  STAND-OFFTIGHT  [STAND-OFF-TIGHT]  35.31,66.8 0 top
JP265  [PAD-JUMPER-3-3OF3_NC_BY_TRACE_YES_SILK_FULL_BOX]  25.15,61.72 180 bottom
JP266  ADD0  [PAD-JUMPER-2-NC_BY_TRACE_YES_SILK]  30.23,66.04 0 bottom
JP267  FIDUCIAL1X2  [FIDUCIAL-1X2]  39.62,61.72 0 top
JP268  FIDUCIAL1X2  [FIDUCIAL-1X2]  48.51,68.07 0 top
JP269  [1X06]  39.62,55.37 0 top
JP270  STAND-OFFTIGHT  [STAND-OFF-TIGHT]  40.89,66.8 0 top
JP271  STAND-OFFTIGHT  [STAND-OFF-TIGHT]  51.05,66.8 0 top
JP272  [PAD-JUMPER-3-3OF3_NC_BY_TRACE_YES_SILK_FULL_BOX]  40.89,61.72 180 bottom
JP273  ADD0  [PAD-JUMPER-2-NC_BY_TRACE_YES_SILK]  45.97,66.04 0 bottom
JP274  FIDUCIAL1X2  [FIDUCIAL-1X2]  55.37,61.72 0 top
JP275  FIDUCIAL1X2  [FIDUCIAL-1X2]  64.26,68.07 0 top
JP276  [1X06]  55.37,55.37 0 top
JP277  STAND-OFFTIGHT  [STAND-OFF-TIGHT]  56.64,66.8 0 top
JP278  STAND-OFFTIGHT  [STAND-OFF-TIGHT]  66.8,66.8 0 top
JP279  [PAD-JUMPER-3-3OF3_NC_BY_TRACE_YES_SILK_FULL_BOX]  56.64,61.72 180 bottom
JP280  ADD0  [PAD-JUMPER-2-NC_BY_TRACE_YES_SILK]  61.72,66.04 0 bottom
JP281  FIDUCIAL1X2  [FIDUCIAL-1X2]  71.12,61.72 0 top
JP282  FIDUCIAL1X2  [FIDUCIAL-1X2]  80.01,68.07 0 top
JP283  [1X06]  71.12,55.37 0 top
JP284  STAND-OFFTIGHT  [STAND-OFF-TIGHT]  72.39,66.8 0 top
JP285  STAND-OFFTIGHT  [STAND-OFF-TIGHT]  82.55,66.8 0 top
JP286  [PAD-JUMPER-3-3OF3_NC_BY_TRACE_YES_SILK_FULL_BOX]  72.39,61.72 180 bottom
JP287  ADD0  [PAD-JUMPER-2-NC_BY_TRACE_YES_SILK]  77.47,66.04 0 bottom
JP288  FIDUCIAL1X2  [FIDUCIAL-1X2]  86.87,61.72 0 top
JP289  FIDUCIAL1X2  [FIDUCIAL-1X2]  95.76,68.07 0 top
JP290  [1X06]  86.87,55.37 0 top
JP291  STAND-OFFTIGHT  [STAND-OFF-TIGHT]  88.14,66.8 0 top
JP292  STAND-OFFTIGHT  [STAND-OFF-TIGHT]  98.3,66.8 0 top
JP293  [PAD-JUMPER-3-3OF3_NC_BY_TRACE_YES_SILK_FULL_BOX]  88.14,61.72 180 bottom
JP294  ADD0  [PAD-JUMPER-2-NC_BY_TRACE_YES_SILK]  93.22,66.04 0 bottom
JP295  FIDUCIAL1X2  [FIDUCIAL-1X2]  102.62,61.72 0 top
JP296  FIDUCIAL1X2  [FIDUCIAL-1X2]  111.51,68.07 0 top
JP297  [1X06]  102.62,55.37 0 top
JP298  STAND-OFFTIGHT  [STAND-OFF-TIGHT]  103.89,66.8 0 top
JP299  STAND-OFFTIGHT  [STAND-OFF-TIGHT]  114.05,66.8 0 top
JP300  [PAD-JUMPER-3-3OF3_NC_BY_TRACE_YES_SILK_FULL_BOX]  103.89,61.72 180 bottom
JP301  ADD0  [PAD-JUMPER-2-NC_BY_TRACE_YES_SILK]  108.97,66.04 0 bottom
JP302  FIDUCIAL1X2  [FIDUCIAL-1X2]  118.36,61.72 0 top
JP303  FIDUCIAL1X2  [FIDUCIAL-1X2]  127.25,68.07 0 top
JP304  [1X06]  118.36,55.37 0 top
JP305  STAND-OFFTIGHT  [STAND-OFF-TIGHT]  119.63,66.8 0 top
JP306  STAND-OFFTIGHT  [STAND-OFF-TIGHT]  129.79,66.8 0 top
JP307  [PAD-JUMPER-3-3OF3_NC_BY_TRACE_YES_SILK_FULL_BOX]  119.63,61.72 180 bottom
JP308  ADD0  [PAD-JUMPER-2-NC_BY_TRACE_YES_SILK]  124.71,66.04 0 bottom
JP309  FIDUCIAL1X2  [FIDUCIAL-1X2]  134.11,61.72 0 top
JP310  FIDUCIAL1X2  [FIDUCIAL-1X2]  143,68.07 0 top
JP311  [1X06]  134.11,55.37 0 top
JP312  STAND-OFFTIGHT  [STAND-OFF-TIGHT]  135.38,66.8 0 top
JP313  STAND-OFFTIGHT  [STAND-OFF-TIGHT]  145.54,66.8 0 top
JP314  [PAD-JUMPER-3-3OF3_NC_BY_TRACE_YES_SILK_FULL_BOX]  135.38,61.72 180 bottom
JP315  ADD0  [PAD-JUMPER-2-NC_BY_TRACE_YES_SILK]  140.46,66.04 0 bottom
JP316  FIDUCIAL1X2  [FIDUCIAL-1X2]  149.86,61.72 0 top
JP317  FIDUCIAL1X2  [FIDUCIAL-1X2]  158.75,68.07 0 top
JP318  [1X06]  149.86,55.37 0 top
JP319  STAND-OFFTIGHT  [STAND-OFF-TIGHT]  151.13,66.8 0 top
JP320  STAND-OFFTIGHT  [STAND-OFF-TIGHT]  161.29,66.8 0 top
JP321  [PAD-JUMPER-3-3OF3_NC_BY_TRACE_YES_SILK_FULL_BOX]  151.13,61.72 180 bottom
JP322  ADD0  [PAD-JUMPER-2-NC_BY_TRACE_YES_SILK]  156.21,66.04 0 bottom
JP323  FIDUCIAL1X2  [FIDUCIAL-1X2]  165.61,61.72 0 top
JP324  FIDUCIAL1X2  [FIDUCIAL-1X2]  174.5,68.07 0 top
JP325  [1X06]  165.61,55.37 0 top
JP326  STAND-OFFTIGHT  [STAND-OFF-TIGHT]  166.88,66.8 0 top
JP327  STAND-OFFTIGHT  [STAND-OFF-TIGHT]  177.04,66.8 0 top
JP328  [PAD-JUMPER-3-3OF3_NC_BY_TRACE_YES_SILK_FULL_BOX]  166.88,61.72 180 bottom
JP329  ADD0  [PAD-JUMPER-2-NC_BY_TRACE_YES_SILK]  171.96,66.04 0 bottom
JP330  FIDUCIAL1X2  [FIDUCIAL-1X2]  181.36,61.72 0 top
JP331  FIDUCIAL1X2  [FIDUCIAL-1X2]  190.25,68.07 0 top
JP332  [1X06]  181.36,55.37 0 top
JP333  STAND-OFFTIGHT  [STAND-OFF-TIGHT]  182.63,66.8 0 top
JP334  STAND-OFFTIGHT  [STAND-OFF-TIGHT]  192.79,66.8 0 top
JP335  [PAD-JUMPER-3-3OF3_NC_BY_TRACE_YES_SILK_FULL_BOX]  182.63,61.72 180 bottom
JP336  ADD0  [PAD-JUMPER-2-NC_BY_TRACE_YES_SILK]  187.71,66.04 0 bottom
JP337  FIDUCIAL1X2  [FIDUCIAL-1X2]  8.13,77.47 0 top
JP338  FIDUCIAL1X2  [FIDUCIAL-1X2]  17.02,83.82 0 top
JP339  [1X06]  8.13,71.12 0 top
JP340  STAND-OFFTIGHT  [STAND-OFF-TIGHT]  9.4,82.55 0 top
JP341  STAND-OFFTIGHT  [STAND-OFF-TIGHT]  19.56,82.55 0 top
JP342  [PAD-JUMPER-3-3OF3_NC_BY_TRACE_YES_SILK_FULL_BOX]  9.4,77.47 180 bottom
JP343  ADD0  [PAD-JUMPER-2-NC_BY_TRACE_YES_SILK]  14.48,81.79 0 bottom
JP344  FIDUCIAL1X2  [FIDUCIAL-1X2]  23.88,77.47 0 top
JP345  FIDUCIAL1X2  [FIDUCIAL-1X2]  32.77,83.82 0 top
JP346  [1X06]  23.88,71.12 0 top
JP347  STAND-OFFTIGHT  [STAND-OFF-TIGHT]  25.15,82.55 0 top
JP348  STAND-OFFTIGHT  [STAND-OFF-TIGHT]  35.31,82.55 0 top
JP349  [PAD-JUMPER-3-3OF3_NC_BY_TRACE_YES_SILK_FULL_BOX]  25.15,77.47 180 bottom
JP350  ADD0  [PAD-JUMPER-2-NC_BY_TRACE_YES_SILK]  30.23,81.79 0 bottom
JP351  FIDUCIAL1X2  [FIDUCIAL-1X2]  39.62,77.47 0 top
JP352  FIDUCIAL1X2  [FIDUCIAL-1X2]  48.51,83.82 0 top
JP353  [1X06]  39.62,71.12 0 top
JP354  STAND-OFFTIGHT  [STAND-OFF-TIGHT]  40.89,82.55 0 top
JP355  STAND-OFFTIGHT  [STAND-OFF-TIGHT]  51.05,82.55 0 top
JP356  [PAD-JUMPER-3-3OF3_NC_BY_TRACE_YES_SILK_FULL_BOX]  40.89,77.47 180 bottom
JP357  ADD0  [PAD-JUMPER-2-NC_BY_TRACE_YES_SILK]  45.97,81.79 0 bottom
JP358  FIDUCIAL1X2  [FIDUCIAL-1X2]  55.37,77.47 0 top
JP359  FIDUCIAL1X2  [FIDUCIAL-1X2]  64.26,83.82 0 top
JP360  [1X06]  55.37,71.12 0 top
JP361  STAND-OFFTIGHT  [STAND-OFF-TIGHT]  56.64,82.55 0 top
JP362  STAND-OFFTIGHT  [STAND-OFF-TIGHT]  66.8,82.55 0 top
JP363  [PAD-JUMPER-3-3OF3_NC_BY_TRACE_YES_SILK_FULL_BOX]  56.64,77.47 180 bottom
JP364  ADD0  [PAD-JUMPER-2-NC_BY_TRACE_YES_SILK]  61.72,81.79 0 bottom
JP365  FIDUCIAL1X2  [FIDUCIAL-1X2]  71.12,77.47 0 top
JP366  FIDUCIAL1X2  [FIDUCIAL-1X2]  80.01,83.82 0 top
JP367  [1X06]  71.12,71.12 0 top
JP368  STAND-OFFTIGHT  [STAND-OFF-TIGHT]  72.39,82.55 0 top
JP369  STAND-OFFTIGHT  [STAND-OFF-TIGHT]  82.55,82.55 0 top
JP370  [PAD-JUMPER-3-3OF3_NC_BY_TRACE_YES_SILK_FULL_BOX]  72.39,77.47 180 bottom
JP371  ADD0  [PAD-JUMPER-2-NC_BY_TRACE_YES_SILK]  77.47,81.79 0 bottom
JP372  FIDUCIAL1X2  [FIDUCIAL-1X2]  86.87,77.47 0 top
JP373  FIDUCIAL1X2  [FIDUCIAL-1X2]  95.76,83.82 0 top
JP374  [1X06]  86.87,71.12 0 top
JP375  STAND-OFFTIGHT  [STAND-OFF-TIGHT]  88.14,82.55 0 top
JP376  STAND-OFFTIGHT  [STAND-OFF-TIGHT]  98.3,82.55 0 top
JP377  [PAD-JUMPER-3-3OF3_NC_BY_TRACE_YES_SILK_FULL_BOX]  88.14,77.47 180 bottom
JP378  ADD0  [PAD-JUMPER-2-NC_BY_TRACE_YES_SILK]  93.22,81.79 0 bottom
JP379  FIDUCIAL1X2  [FIDUCIAL-1X2]  102.62,77.47 0 top
JP380  FIDUCIAL1X2  [FIDUCIAL-1X2]  111.51,83.82 0 top
JP381  [1X06]  102.62,71.12 0 top
JP382  STAND-OFFTIGHT  [STAND-OFF-TIGHT]  103.89,82.55 0 top
JP383  STAND-OFFTIGHT  [STAND-OFF-TIGHT]  114.05,82.55 0 top
JP384  [PAD-JUMPER-3-3OF3_NC_BY_TRACE_YES_SILK_FULL_BOX]  103.89,77.47 180 bottom
JP385  ADD0  [PAD-JUMPER-2-NC_BY_TRACE_YES_SILK]  108.97,81.79 0 bottom
JP386  FIDUCIAL1X2  [FIDUCIAL-1X2]  118.36,77.47 0 top
JP387  FIDUCIAL1X2  [FIDUCIAL-1X2]  127.25,83.82 0 top
JP388  [1X06]  118.36,71.12 0 top
JP389  STAND-OFFTIGHT  [STAND-OFF-TIGHT]  119.63,82.55 0 top
JP390  STAND-OFFTIGHT  [STAND-OFF-TIGHT]  129.79,82.55 0 top
JP391  [PAD-JUMPER-3-3OF3_NC_BY_TRACE_YES_SILK_FULL_BOX]  119.63,77.47 180 bottom
JP392  ADD0  [PAD-JUMPER-2-NC_BY_TRACE_YES_SILK]  124.71,81.79 0 bottom
JP393  FIDUCIAL1X2  [FIDUCIAL-1X2]  134.11,77.47 0 top
JP394  FIDUCIAL1X2  [FIDUCIAL-1X2]  143,83.82 0 top
JP395  [1X06]  134.11,71.12 0 top
JP396  STAND-OFFTIGHT  [STAND-OFF-TIGHT]  135.38,82.55 0 top
JP397  STAND-OFFTIGHT  [STAND-OFF-TIGHT]  145.54,82.55 0 top
JP398  [PAD-JUMPER-3-3OF3_NC_BY_TRACE_YES_SILK_FULL_BOX]  135.38,77.47 180 bottom
JP399  ADD0  [PAD-JUMPER-2-NC_BY_TRACE_YES_SILK]  140.46,81.79 0 bottom
JP400  FIDUCIAL1X2  [FIDUCIAL-1X2]  149.86,77.47 0 top
JP401  FIDUCIAL1X2  [FIDUCIAL-1X2]  158.75,83.82 0 top
JP402  [1X06]  149.86,71.12 0 top
JP403  STAND-OFFTIGHT  [STAND-OFF-TIGHT]  151.13,82.55 0 top
JP404  STAND-OFFTIGHT  [STAND-OFF-TIGHT]  161.29,82.55 0 top
JP405  [PAD-JUMPER-3-3OF3_NC_BY_TRACE_YES_SILK_FULL_BOX]  151.13,77.47 180 bottom
JP406  ADD0  [PAD-JUMPER-2-NC_BY_TRACE_YES_SILK]  156.21,81.79 0 bottom
JP407  FIDUCIAL1X2  [FIDUCIAL-1X2]  165.61,77.47 0 top
JP408  FIDUCIAL1X2  [FIDUCIAL-1X2]  174.5,83.82 0 top
JP409  [1X06]  165.61,71.12 0 top
JP410  STAND-OFFTIGHT  [STAND-OFF-TIGHT]  166.88,82.55 0 top
JP411  STAND-OFFTIGHT  [STAND-OFF-TIGHT]  177.04,82.55 0 top
JP412  [PAD-JUMPER-3-3OF3_NC_BY_TRACE_YES_SILK_FULL_BOX]  166.88,77.47 180 bottom
JP413  ADD0  [PAD-JUMPER-2-NC_BY_TRACE_YES_SILK]  171.96,81.79 0 bottom
JP414  FIDUCIAL1X2  [FIDUCIAL-1X2]  181.36,77.47 0 top
JP415  FIDUCIAL1X2  [FIDUCIAL-1X2]  190.25,83.82 0 top
JP416  [1X06]  181.36,71.12 0 top
JP417  STAND-OFFTIGHT  [STAND-OFF-TIGHT]  182.63,82.55 0 top
JP418  STAND-OFFTIGHT  [STAND-OFF-TIGHT]  192.79,82.55 0 top
JP419  [PAD-JUMPER-3-3OF3_NC_BY_TRACE_YES_SILK_FULL_BOX]  182.63,77.47 180 bottom
JP420  ADD0  [PAD-JUMPER-2-NC_BY_TRACE_YES_SILK]  187.71,81.79 0 bottom
JP421  FIDUCIAL1X2  [FIDUCIAL-1X2]  8.13,93.22 0 top
JP422  FIDUCIAL1X2  [FIDUCIAL-1X2]  17.02,99.57 0 top
JP423  [1X06]  8.13,86.87 0 top
JP424  STAND-OFFTIGHT  [STAND-OFF-TIGHT]  9.4,98.3 0 top
JP425  STAND-OFFTIGHT  [STAND-OFF-TIGHT]  19.56,98.3 0 top
JP426  [PAD-JUMPER-3-3OF3_NC_BY_TRACE_YES_SILK_FULL_BOX]  9.4,93.22 180 bottom
JP427  ADD0  [PAD-JUMPER-2-NC_BY_TRACE_YES_SILK]  14.48,97.54 0 bottom
JP428  FIDUCIAL1X2  [FIDUCIAL-1X2]  23.88,93.22 0 top
JP429  FIDUCIAL1X2  [FIDUCIAL-1X2]  32.77,99.57 0 top
JP430  [1X06]  23.88,86.87 0 top
JP431  STAND-OFFTIGHT  [STAND-OFF-TIGHT]  25.15,98.3 0 top
JP432  STAND-OFFTIGHT  [STAND-OFF-TIGHT]  35.31,98.3 0 top
JP433  [PAD-JUMPER-3-3OF3_NC_BY_TRACE_YES_SILK_FULL_BOX]  25.15,93.22 180 bottom
JP434  ADD0  [PAD-JUMPER-2-NC_BY_TRACE_YES_SILK]  30.23,97.54 0 bottom
JP435  FIDUCIAL1X2  [FIDUCIAL-1X2]  39.62,93.22 0 top
JP436  FIDUCIAL1X2  [FIDUCIAL-1X2]  48.51,99.57 0 top
JP437  [1X06]  39.62,86.87 0 top
JP438  STAND-OFFTIGHT  [STAND-OFF-TIGHT]  40.89,98.3 0 top
JP439  STAND-OFFTIGHT  [STAND-OFF-TIGHT]  51.05,98.3 0 top
JP440  [PAD-JUMPER-3-3OF3_NC_BY_TRACE_YES_SILK_FULL_BOX]  40.89,93.22 180 bottom
JP441  ADD0  [PAD-JUMPER-2-NC_BY_TRACE_YES_SILK]  45.97,97.54 0 bottom
JP442  FIDUCIAL1X2  [FIDUCIAL-1X2]  55.37,93.22 0 top
JP443  FIDUCIAL1X2  [FIDUCIAL-1X2]  64.26,99.57 0 top
JP444  [1X06]  55.37,86.87 0 top
JP445  STAND-OFFTIGHT  [STAND-OFF-TIGHT]  56.64,98.3 0 top
JP446  STAND-OFFTIGHT  [STAND-OFF-TIGHT]  66.8,98.3 0 top
JP447  [PAD-JUMPER-3-3OF3_NC_BY_TRACE_YES_SILK_FULL_BOX]  56.64,93.22 180 bottom
JP448  ADD0  [PAD-JUMPER-2-NC_BY_TRACE_YES_SILK]  61.72,97.54 0 bottom
JP449  FIDUCIAL1X2  [FIDUCIAL-1X2]  71.12,93.22 0 top
JP450  FIDUCIAL1X2  [FIDUCIAL-1X2]  80.01,99.57 0 top
JP451  [1X06]  71.12,86.87 0 top
JP452  STAND-OFFTIGHT  [STAND-OFF-TIGHT]  72.39,98.3 0 top
JP453  STAND-OFFTIGHT  [STAND-OFF-TIGHT]  82.55,98.3 0 top
JP454  [PAD-JUMPER-3-3OF3_NC_BY_TRACE_YES_SILK_FULL_BOX]  72.39,93.22 180 bottom
JP455  ADD0  [PAD-JUMPER-2-NC_BY_TRACE_YES_SILK]  77.47,97.54 0 bottom
JP456  FIDUCIAL1X2  [FIDUCIAL-1X2]  86.87,93.22 0 top
JP457  FIDUCIAL1X2  [FIDUCIAL-1X2]  95.76,99.57 0 top
JP458  [1X06]  86.87,86.87 0 top
JP459  STAND-OFFTIGHT  [STAND-OFF-TIGHT]  88.14,98.3 0 top
JP460  STAND-OFFTIGHT  [STAND-OFF-TIGHT]  98.3,98.3 0 top
JP461  [PAD-JUMPER-3-3OF3_NC_BY_TRACE_YES_SILK_FULL_BOX]  88.14,93.22 180 bottom
JP462  ADD0  [PAD-JUMPER-2-NC_BY_TRACE_YES_SILK]  93.22,97.54 0 bottom
JP463  FIDUCIAL1X2  [FIDUCIAL-1X2]  102.62,93.22 0 top
JP464  FIDUCIAL1X2  [FIDUCIAL-1X2]  111.51,99.57 0 top
JP465  [1X06]  102.62,86.87 0 top
JP466  STAND-OFFTIGHT  [STAND-OFF-TIGHT]  103.89,98.3 0 top
JP467  STAND-OFFTIGHT  [STAND-OFF-TIGHT]  114.05,98.3 0 top
JP468  [PAD-JUMPER-3-3OF3_NC_BY_TRACE_YES_SILK_FULL_BOX]  103.89,93.22 180 bottom
JP469  ADD0  [PAD-JUMPER-2-NC_BY_TRACE_YES_SILK]  108.97,97.54 0 bottom
JP470  FIDUCIAL1X2  [FIDUCIAL-1X2]  118.36,93.22 0 top
JP471  FIDUCIAL1X2  [FIDUCIAL-1X2]  127.25,99.57 0 top
JP472  [1X06]  118.36,86.87 0 top
JP473  STAND-OFFTIGHT  [STAND-OFF-TIGHT]  119.63,98.3 0 top
JP474  STAND-OFFTIGHT  [STAND-OFF-TIGHT]  129.79,98.3 0 top
JP475  [PAD-JUMPER-3-3OF3_NC_BY_TRACE_YES_SILK_FULL_BOX]  119.63,93.22 180 bottom
JP476  ADD0  [PAD-JUMPER-2-NC_BY_TRACE_YES_SILK]  124.71,97.54 0 bottom
JP477  FIDUCIAL1X2  [FIDUCIAL-1X2]  134.11,93.22 0 top
JP478  FIDUCIAL1X2  [FIDUCIAL-1X2]  143,99.57 0 top
JP479  [1X06]  134.11,86.87 0 top
JP480  STAND-OFFTIGHT  [STAND-OFF-TIGHT]  135.38,98.3 0 top
JP481  STAND-OFFTIGHT  [STAND-OFF-TIGHT]  145.54,98.3 0 top
JP482  [PAD-JUMPER-3-3OF3_NC_BY_TRACE_YES_SILK_FULL_BOX]  135.38,93.22 180 bottom
JP483  ADD0  [PAD-JUMPER-2-NC_BY_TRACE_YES_SILK]  140.46,97.54 0 bottom
JP484  FIDUCIAL1X2  [FIDUCIAL-1X2]  149.86,93.22 0 top
JP485  FIDUCIAL1X2  [FIDUCIAL-1X2]  158.75,99.57 0 top
JP486  [1X06]  149.86,86.87 0 top
JP487  STAND-OFFTIGHT  [STAND-OFF-TIGHT]  151.13,98.3 0 top
JP488  STAND-OFFTIGHT  [STAND-OFF-TIGHT]  161.29,98.3 0 top
JP489  [PAD-JUMPER-3-3OF3_NC_BY_TRACE_YES_SILK_FULL_BOX]  151.13,93.22 180 bottom
JP490  ADD0  [PAD-JUMPER-2-NC_BY_TRACE_YES_SILK]  156.21,97.54 0 bottom
JP491  FIDUCIAL1X2  [FIDUCIAL-1X2]  165.61,93.22 0 top
JP492  FIDUCIAL1X2  [FIDUCIAL-1X2]  174.5,99.57 0 top
JP493  [1X06]  165.61,86.87 0 top
JP494  STAND-OFFTIGHT  [STAND-OFF-TIGHT]  166.88,98.3 0 top
JP495  STAND-OFFTIGHT  [STAND-OFF-TIGHT]  177.04,98.3 0 top
JP496  [PAD-JUMPER-3-3OF3_NC_BY_TRACE_YES_SILK_FULL_BOX]  166.88,93.22 180 bottom
JP497  ADD0  [PAD-JUMPER-2-NC_BY_TRACE_YES_SILK]  171.96,97.54 0 bottom
JP498  FIDUCIAL1X2  [FIDUCIAL-1X2]  181.36,93.22 0 top
JP499  FIDUCIAL1X2  [FIDUCIAL-1X2]  190.25,99.57 0 top
JP500  [1X06]  181.36,86.87 0 top
JP501  STAND-OFFTIGHT  [STAND-OFF-TIGHT]  182.63,98.3 0 top
JP502  STAND-OFFTIGHT  [STAND-OFF-TIGHT]  192.79,98.3 0 top
JP503  [PAD-JUMPER-3-3OF3_NC_BY_TRACE_YES_SILK_FULL_BOX]  182.63,93.22 180 bottom
JP504  ADD0  [PAD-JUMPER-2-NC_BY_TRACE_YES_SILK]  187.71,97.54 0 bottom
LOGO1  SFE_LOGO_FLAME.1_INCH  [SFE_LOGO_FLAME_.1]  29.08,18.67 0 top
LOGO2  SFE_LOGO_FLAME.1_INCH  [SFE_LOGO_FLAME_.1]  13.34,18.67 0 top
LOGO3  OSHW-LOGOS  [OSHW-LOGO-S]  19.56,16.13 0 bottom
LOGO4  OSHW-LOGOS  [OSHW-LOGO-S]  35.31,16.13 0 bottom
LOGO5  SFE_LOGO_FLAME.1_INCH  [SFE_LOGO_FLAME_.1]  44.83,18.67 0 top
LOGO6  OSHW-LOGOS  [OSHW-LOGO-S]  51.05,16.13 0 bottom
LOGO7  SFE_LOGO_FLAME.1_INCH  [SFE_LOGO_FLAME_.1]  60.58,18.67 0 top
LOGO8  OSHW-LOGOS  [OSHW-LOGO-S]  66.8,16.13 0 bottom
LOGO9  SFE_LOGO_FLAME.1_INCH  [SFE_LOGO_FLAME_.1]  76.33,18.67 0 top
LOGO10  OSHW-LOGOS  [OSHW-LOGO-S]  82.55,16.13 0 bottom
LOGO11  SFE_LOGO_FLAME.1_INCH  [SFE_LOGO_FLAME_.1]  92.08,18.67 0 top
LOGO12  OSHW-LOGOS  [OSHW-LOGO-S]  98.3,16.13 0 bottom
LOGO13  SFE_LOGO_FLAME.1_INCH  [SFE_LOGO_FLAME_.1]  107.82,18.67 0 top
LOGO14  OSHW-LOGOS  [OSHW-LOGO-S]  114.05,16.13 0 bottom
LOGO15  SFE_LOGO_FLAME.1_INCH  [SFE_LOGO_FLAME_.1]  123.57,18.67 0 top
LOGO16  OSHW-LOGOS  [OSHW-LOGO-S]  129.79,16.13 0 bottom
LOGO17  SFE_LOGO_FLAME.1_INCH  [SFE_LOGO_FLAME_.1]  139.32,18.67 0 top
LOGO18  OSHW-LOGOS  [OSHW-LOGO-S]  145.54,16.13 0 bottom
LOGO19  SFE_LOGO_FLAME.1_INCH  [SFE_LOGO_FLAME_.1]  155.07,18.67 0 top
LOGO20  OSHW-LOGOS  [OSHW-LOGO-S]  161.29,16.13 0 bottom
LOGO21  SFE_LOGO_FLAME.1_INCH  [SFE_LOGO_FLAME_.1]  170.81,18.67 0 top
LOGO22  OSHW-LOGOS  [OSHW-LOGO-S]  177.04,16.13 0 bottom
LOGO23  SFE_LOGO_FLAME.1_INCH  [SFE_LOGO_FLAME_.1]  186.56,18.67 0 top
LOGO24  OSHW-LOGOS  [OSHW-LOGO-S]  192.79,16.13 0 bottom
LOGO25  SFE_LOGO_FLAME.1_INCH  [SFE_LOGO_FLAME_.1]  13.34,34.42 0 top
LOGO26  OSHW-LOGOS  [OSHW-LOGO-S]  19.56,31.88 0 bottom
LOGO27  SFE_LOGO_FLAME.1_INCH  [SFE_LOGO_FLAME_.1]  29.08,34.42 0 top
LOGO28  OSHW-LOGOS  [OSHW-LOGO-S]  35.31,31.88 0 bottom
LOGO29  SFE_LOGO_FLAME.1_INCH  [SFE_LOGO_FLAME_.1]  44.83,34.42 0 top
LOGO30  OSHW-LOGOS  [OSHW-LOGO-S]  51.05,31.88 0 bottom
LOGO31  SFE_LOGO_FLAME.1_INCH  [SFE_LOGO_FLAME_.1]  60.58,34.42 0 top
LOGO32  OSHW-LOGOS  [OSHW-LOGO-S]  66.8,31.88 0 bottom
LOGO33  SFE_LOGO_FLAME.1_INCH  [SFE_LOGO_FLAME_.1]  76.33,34.42 0 top
LOGO34  OSHW-LOGOS  [OSHW-LOGO-S]  82.55,31.88 0 bottom
LOGO35  SFE_LOGO_FLAME.1_INCH  [SFE_LOGO_FLAME_.1]  92.08,34.42 0 top
LOGO36  OSHW-LOGOS  [OSHW-LOGO-S]  98.3,31.88 0 bottom
LOGO37  SFE_LOGO_FLAME.1_INCH  [SFE_LOGO_FLAME_.1]  107.82,34.42 0 top
LOGO38  OSHW-LOGOS  [OSHW-LOGO-S]  114.05,31.88 0 bottom
LOGO39  SFE_LOGO_FLAME.1_INCH  [SFE_LOGO_FLAME_.1]  123.57,34.42 0 top
LOGO40  OSHW-LOGOS  [OSHW-LOGO-S]  129.79,31.88 0 bottom
LOGO41  SFE_LOGO_FLAME.1_INCH  [SFE_LOGO_FLAME_.1]  139.32,34.42 0 top
LOGO42  OSHW-LOGOS  [OSHW-LOGO-S]  145.54,31.88 0 bottom
LOGO43  SFE_LOGO_FLAME.1_INCH  [SFE_LOGO_FLAME_.1]  155.07,34.42 0 top
LOGO44  OSHW-LOGOS  [OSHW-LOGO-S]  161.29,31.88 0 bottom
LOGO45  SFE_LOGO_FLAME.1_INCH  [SFE_LOGO_FLAME_.1]  170.81,34.42 0 top
LOGO46  OSHW-LOGOS  [OSHW-LOGO-S]  177.04,31.88 0 bottom
LOGO47  SFE_LOGO_FLAME.1_INCH  [SFE_LOGO_FLAME_.1]  186.56,34.42 0 top
LOGO48  OSHW-LOGOS  [OSHW-LOGO-S]  192.79,31.88 0 bottom
LOGO49  SFE_LOGO_FLAME.1_INCH  [SFE_LOGO_FLAME_.1]  13.34,50.16 0 top
LOGO50  OSHW-LOGOS  [OSHW-LOGO-S]  19.56,47.62 0 bottom
LOGO51  SFE_LOGO_FLAME.1_INCH  [SFE_LOGO_FLAME_.1]  29.08,50.16 0 top
LOGO52  OSHW-LOGOS  [OSHW-LOGO-S]  35.31,47.62 0 bottom
LOGO53  SFE_LOGO_FLAME.1_INCH  [SFE_LOGO_FLAME_.1]  44.83,50.16 0 top
LOGO54  OSHW-LOGOS  [OSHW-LOGO-S]  51.05,47.62 0 bottom
LOGO55  SFE_LOGO_FLAME.1_INCH  [SFE_LOGO_FLAME_.1]  60.58,50.16 0 top
LOGO56  OSHW-LOGOS  [OSHW-LOGO-S]  66.8,47.62 0 bottom
LOGO57  SFE_LOGO_FLAME.1_INCH  [SFE_LOGO_FLAME_.1]  76.33,50.16 0 top
LOGO58  OSHW-LOGOS  [OSHW-LOGO-S]  82.55,47.62 0 bottom
LOGO59  SFE_LOGO_FLAME.1_INCH  [SFE_LOGO_FLAME_.1]  92.08,50.16 0 top
LOGO60  OSHW-LOGOS  [OSHW-LOGO-S]  98.3,47.62 0 bottom
LOGO61  SFE_LOGO_FLAME.1_INCH  [SFE_LOGO_FLAME_.1]  107.82,50.16 0 top
LOGO62  OSHW-LOGOS  [OSHW-LOGO-S]  114.05,47.62 0 bottom
LOGO63  SFE_LOGO_FLAME.1_INCH  [SFE_LOGO_FLAME_.1]  123.57,50.16 0 top
LOGO64  OSHW-LOGOS  [OSHW-LOGO-S]  129.79,47.62 0 bottom
LOGO65  SFE_LOGO_FLAME.1_INCH  [SFE_LOGO_FLAME_.1]  139.32,50.16 0 top
LOGO66  OSHW-LOGOS  [OSHW-LOGO-S]  145.54,47.62 0 bottom
LOGO67  SFE_LOGO_FLAME.1_INCH  [SFE_LOGO_FLAME_.1]  155.07,50.16 0 top
LOGO68  OSHW-LOGOS  [OSHW-LOGO-S]  161.29,47.62 0 bottom
LOGO69  SFE_LOGO_FLAME.1_INCH  [SFE_LOGO_FLAME_.1]  170.81,50.16 0 top
LOGO70  OSHW-LOGOS  [OSHW-LOGO-S]  177.04,47.62 0 bottom
LOGO71  SFE_LOGO_FLAME.1_INCH  [SFE_LOGO_FLAME_.1]  186.56,50.16 0 top
LOGO72  OSHW-LOGOS  [OSHW-LOGO-S]  192.79,47.62 0 bottom
LOGO73  SFE_LOGO_FLAME.1_INCH  [SFE_LOGO_FLAME_.1]  13.34,65.91 0 top
LOGO74  OSHW-LOGOS  [OSHW-LOGO-S]  19.56,63.37 0 bottom
LOGO75  SFE_LOGO_FLAME.1_INCH  [SFE_LOGO_FLAME_.1]  29.08,65.91 0 top
LOGO76  OSHW-LOGOS  [OSHW-LOGO-S]  35.31,63.37 0 bottom
LOGO77  SFE_LOGO_FLAME.1_INCH  [SFE_LOGO_FLAME_.1]  44.83,65.91 0 top
LOGO78  OSHW-LOGOS  [OSHW-LOGO-S]  51.05,63.37 0 bottom
LOGO79  SFE_LOGO_FLAME.1_INCH  [SFE_LOGO_FLAME_.1]  60.58,65.91 0 top
LOGO80  OSHW-LOGOS  [OSHW-LOGO-S]  66.8,63.37 0 bottom
LOGO81  SFE_LOGO_FLAME.1_INCH  [SFE_LOGO_FLAME_.1]  76.33,65.91 0 top
LOGO82  OSHW-LOGOS  [OSHW-LOGO-S]  82.55,63.37 0 bottom
LOGO83  SFE_LOGO_FLAME.1_INCH  [SFE_LOGO_FLAME_.1]  92.08,65.91 0 top
LOGO84  OSHW-LOGOS  [OSHW-LOGO-S]  98.3,63.37 0 bottom
LOGO85  SFE_LOGO_FLAME.1_INCH  [SFE_LOGO_FLAME_.1]  107.82,65.91 0 top
LOGO86  OSHW-LOGOS  [OSHW-LOGO-S]  114.05,63.37 0 bottom
LOGO87  SFE_LOGO_FLAME.1_INCH  [SFE_LOGO_FLAME_.1]  123.57,65.91 0 top
LOGO88  OSHW-LOGOS  [OSHW-LOGO-S]  129.79,63.37 0 bottom
LOGO89  SFE_LOGO_FLAME.1_INCH  [SFE_LOGO_FLAME_.1]  139.32,65.91 0 top
LOGO90  OSHW-LOGOS  [OSHW-LOGO-S]  145.54,63.37 0 bottom
LOGO91  SFE_LOGO_FLAME.1_INCH  [SFE_LOGO_FLAME_.1]  155.07,65.91 0 top
LOGO92  OSHW-LOGOS  [OSHW-LOGO-S]  161.29,63.37 0 bottom
LOGO93  SFE_LOGO_FLAME.1_INCH  [SFE_LOGO_FLAME_.1]  170.81,65.91 0 top
LOGO94  OSHW-LOGOS  [OSHW-LOGO-S]  177.04,63.37 0 bottom
LOGO95  SFE_LOGO_FLAME.1_INCH  [SFE_LOGO_FLAME_.1]  186.56,65.91 0 top
LOGO96  OSHW-LOGOS  [OSHW-LOGO-S]  192.79,63.37 0 bottom
LOGO97  SFE_LOGO_FLAME.1_INCH  [SFE_LOGO_FLAME_.1]  13.34,81.66 0 top
LOGO98  OSHW-LOGOS  [OSHW-LOGO-S]  19.56,79.12 0 bottom
LOGO99  SFE_LOGO_FLAME.1_INCH  [SFE_LOGO_FLAME_.1]  29.08,81.66 0 top
LOGO100  OSHW-LOGOS  [OSHW-LOGO-S]  35.31,79.12 0 bottom
LOGO101  SFE_LOGO_FLAME.1_INCH  [SFE_LOGO_FLAME_.1]  44.83,81.66 0 top
LOGO102  OSHW-LOGOS  [OSHW-LOGO-S]  51.05,79.12 0 bottom
LOGO103  SFE_LOGO_FLAME.1_INCH  [SFE_LOGO_FLAME_.1]  60.58,81.66 0 top
LOGO104  OSHW-LOGOS  [OSHW-LOGO-S]  66.8,79.12 0 bottom
LOGO105  SFE_LOGO_FLAME.1_INCH  [SFE_LOGO_FLAME_.1]  76.33,81.66 0 top
LOGO106  OSHW-LOGOS  [OSHW-LOGO-S]  82.55,79.12 0 bottom
LOGO107  SFE_LOGO_FLAME.1_INCH  [SFE_LOGO_FLAME_.1]  92.08,81.66 0 top
LOGO108  OSHW-LOGOS  [OSHW-LOGO-S]  98.3,79.12 0 bottom
LOGO109  SFE_LOGO_FLAME.1_INCH  [SFE_LOGO_FLAME_.1]  107.82,81.66 0 top
LOGO110  OSHW-LOGOS  [OSHW-LOGO-S]  114.05,79.12 0 bottom
LOGO111  SFE_LOGO_FLAME.1_INCH  [SFE_LOGO_FLAME_.1]  123.57,81.66 0 top
LOGO112  OSHW-LOGOS  [OSHW-LOGO-S]  129.79,79.12 0 bottom
LOGO113  SFE_LOGO_FLAME.1_INCH  [SFE_LOGO_FLAME_.1]  139.32,81.66 0 top
LOGO114  OSHW-LOGOS  [OSHW-LOGO-S]  145.54,79.12 0 bottom
LOGO115  SFE_LOGO_FLAME.1_INCH  [SFE_LOGO_FLAME_.1]  155.07,81.66 0 top
LOGO116  OSHW-LOGOS  [OSHW-LOGO-S]  161.29,79.12 0 bottom
LOGO117  SFE_LOGO_FLAME.1_INCH  [SFE_LOGO_FLAME_.1]  170.81,81.66 0 top
LOGO118  OSHW-LOGOS  [OSHW-LOGO-S]  177.04,79.12 0 bottom
LOGO119  SFE_LOGO_FLAME.1_INCH  [SFE_LOGO_FLAME_.1]  186.56,81.66 0 top
LOGO120  OSHW-LOGOS  [OSHW-LOGO-S]  192.79,79.12 0 bottom
LOGO121  SFE_LOGO_FLAME.1_INCH  [SFE_LOGO_FLAME_.1]  13.34,97.41 0 top
LOGO122  OSHW-LOGOS  [OSHW-LOGO-S]  19.56,94.87 0 bottom
LOGO123  SFE_LOGO_FLAME.1_INCH  [SFE_LOGO_FLAME_.1]  29.08,97.41 0 top
LOGO124  OSHW-LOGOS  [OSHW-LOGO-S]  35.31,94.87 0 bottom
LOGO125  SFE_LOGO_FLAME.1_INCH  [SFE_LOGO_FLAME_.1]  44.83,97.41 0 top
LOGO126  OSHW-LOGOS  [OSHW-LOGO-S]  51.05,94.87 0 bottom
LOGO127  SFE_LOGO_FLAME.1_INCH  [SFE_LOGO_FLAME_.1]  60.58,97.41 0 top
LOGO128  OSHW-LOGOS  [OSHW-LOGO-S]  66.8,94.87 0 bottom
LOGO129  SFE_LOGO_FLAME.1_INCH  [SFE_LOGO_FLAME_.1]  76.33,97.41 0 top
LOGO130  OSHW-LOGOS  [OSHW-LOGO-S]  82.55,94.87 0 bottom
LOGO131  SFE_LOGO_FLAME.1_INCH  [SFE_LOGO_FLAME_.1]  92.08,97.41 0 top
LOGO132  OSHW-LOGOS  [OSHW-LOGO-S]  98.3,94.87 0 bottom
LOGO133  SFE_LOGO_FLAME.1_INCH  [SFE_LOGO_FLAME_.1]  107.82,97.41 0 top
LOGO134  OSHW-LOGOS  [OSHW-LOGO-S]  114.05,94.87 0 bottom
LOGO135  SFE_LOGO_FLAME.1_INCH  [SFE_LOGO_FLAME_.1]  123.57,97.41 0 top
LOGO136  OSHW-LOGOS  [OSHW-LOGO-S]  129.79,94.87 0 bottom
LOGO137  SFE_LOGO_FLAME.1_INCH  [SFE_LOGO_FLAME_.1]  139.32,97.41 0 top
LOGO138  OSHW-LOGOS  [OSHW-LOGO-S]  145.54,94.87 0 bottom
LOGO139  SFE_LOGO_FLAME.1_INCH  [SFE_LOGO_FLAME_.1]  155.07,97.41 0 top
LOGO140  OSHW-LOGOS  [OSHW-LOGO-S]  161.29,94.87 0 bottom
LOGO141  SFE_LOGO_FLAME.1_INCH  [SFE_LOGO_FLAME_.1]  170.81,97.41 0 top
LOGO142  OSHW-LOGOS  [OSHW-LOGO-S]  177.04,94.87 0 bottom
LOGO143  SFE_LOGO_FLAME.1_INCH  [SFE_LOGO_FLAME_.1]  186.56,97.41 0 top
LOGO144  OSHW-LOGOS  [OSHW-LOGO-S]  192.79,94.87 0 bottom
R1  10K  [0603-RES]  17.02,11.94 90 top
R2  4.7K  [0603-RES]  11.94,11.94 90 top
R3  4.7K  [0603-RES]  14.48,11.94 90 top
R4  10K  [0603-RES]  19.56,11.94 270 top
R5  4.7K  [0603-RES]  27.69,11.94 90 top
R6  4.7K  [0603-RES]  30.23,11.94 90 top
R7  10K  [0603-RES]  32.77,11.94 90 top
R8  10K  [0603-RES]  35.31,11.94 270 top
R9  4.7K  [0603-RES]  43.43,11.94 90 top
R10  4.7K  [0603-RES]  45.97,11.94 90 top
R11  10K  [0603-RES]  48.51,11.94 90 top
R12  10K  [0603-RES]  51.05,11.94 270 top
R13  4.7K  [0603-RES]  59.18,11.94 90 top
R14  4.7K  [0603-RES]  61.72,11.94 90 top
R15  10K  [0603-RES]  64.26,11.94 90 top
R16  10K  [0603-RES]  66.8,11.94 270 top
R17  4.7K  [0603-RES]  74.93,11.94 90 top
R18  4.7K  [0603-RES]  77.47,11.94 90 top
R19  10K  [0603-RES]  80.01,11.94 90 top
R20  10K  [0603-RES]  82.55,11.94 270 top
R21  4.7K  [0603-RES]  90.68,11.94 90 top
R22  4.7K  [0603-RES]  93.22,11.94 90 top
R23  10K  [0603-RES]  95.76,11.94 90 top
R24  10K  [0603-RES]  98.3,11.94 270 top
R25  4.7K  [0603-RES]  106.43,11.94 90 top
R26  4.7K  [0603-RES]  108.97,11.94 90 top
R27  10K  [0603-RES]  111.51,11.94 90 top
R28  10K  [0603-RES]  114.05,11.94 270 top
R29  4.7K  [0603-RES]  122.17,11.94 90 top
R30  4.7K  [0603-RES]  124.71,11.94 90 top
R31  10K  [0603-RES]  127.25,11.94 90 top
R32  10K  [0603-RES]  129.79,11.94 270 top
R33  4.7K  [0603-RES]  137.92,11.94 90 top
R34  4.7K  [0603-RES]  140.46,11.94 90 top
R35  10K  [0603-RES]  143,11.94 90 top
R36  10K  [0603-RES]  145.54,11.94 270 top
R37  4.7K  [0603-RES]  153.67,11.94 90 top
R38  4.7K  [0603-RES]  156.21,11.94 90 top
R39  10K  [0603-RES]  158.75,11.94 90 top
R40  10K  [0603-RES]  161.29,11.94 270 top
R41  4.7K  [0603-RES]  169.42,11.94 90 top
R42  4.7K  [0603-RES]  171.96,11.94 90 top
R43  10K  [0603-RES]  174.5,11.94 90 top
R44  10K  [0603-RES]  177.04,11.94 270 top
R45  4.7K  [0603-RES]  185.17,11.94 90 top
R46  4.7K  [0603-RES]  187.71,11.94 90 top
R47  10K  [0603-RES]  190.25,11.94 90 top
R48  10K  [0603-RES]  192.79,11.94 270 top
R49  4.7K  [0603-RES]  11.94,27.69 90 top
R50  4.7K  [0603-RES]  14.48,27.69 90 top
R51  10K  [0603-RES]  17.02,27.69 90 top
R52  10K  [0603-RES]  19.56,27.69 270 top
R53  4.7K  [0603-RES]  27.69,27.69 90 top
R54  4.7K  [0603-RES]  30.23,27.69 90 top
R55  10K  [0603-RES]  32.77,27.69 90 top
R56  10K  [0603-RES]  35.31,27.69 270 top
R57  4.7K  [0603-RES]  43.43,27.69 90 top
R58  4.7K  [0603-RES]  45.97,27.69 90 top
R59  10K  [0603-RES]  48.51,27.69 90 top
R60  10K  [0603-RES]  51.05,27.69 270 top
R61  4.7K  [0603-RES]  59.18,27.69 90 top
R62  4.7K  [0603-RES]  61.72,27.69 90 top
R63  10K  [0603-RES]  64.26,27.69 90 top
R64  10K  [0603-RES]  66.8,27.69 270 top
R65  4.7K  [0603-RES]  74.93,27.69 90 top
R66  4.7K  [0603-RES]  77.47,27.69 90 top
R67  10K  [0603-RES]  80.01,27.69 90 top
R68  10K  [0603-RES]  82.55,27.69 270 top
R69  4.7K  [0603-RES]  90.68,27.69 90 top
R70  4.7K  [0603-RES]  93.22,27.69 90 top
R71  10K  [0603-RES]  95.76,27.69 90 top
R72  10K  [0603-RES]  98.3,27.69 270 top
R73  4.7K  [0603-RES]  106.43,27.69 90 top
R74  4.7K  [0603-RES]  108.97,27.69 90 top
R75  10K  [0603-RES]  111.51,27.69 90 top
R76  10K  [0603-RES]  114.05,27.69 270 top
R77  4.7K  [0603-RES]  122.17,27.69 90 top
R78  4.7K  [0603-RES]  124.71,27.69 90 top
R79  10K  [0603-RES]  127.25,27.69 90 top
R80  10K  [0603-RES]  129.79,27.69 270 top
R81  4.7K  [0603-RES]  137.92,27.69 90 top
R82  4.7K  [0603-RES]  140.46,27.69 90 top
R83  10K  [0603-RES]  143,27.69 90 top
R84  10K  [0603-RES]  145.54,27.69 270 top
R85  4.7K  [0603-RES]  153.67,27.69 90 top
R86  4.7K  [0603-RES]  156.21,27.69 90 top
R87  10K  [0603-RES]  158.75,27.69 90 top
R88  10K  [0603-RES]  161.29,27.69 270 top
R89  4.7K  [0603-RES]  169.42,27.69 90 top
R90  4.7K  [0603-RES]  171.96,27.69 90 top
R91  10K  [0603-RES]  174.5,27.69 90 top
R92  10K  [0603-RES]  177.04,27.69 270 top
R93  4.7K  [0603-RES]  185.17,27.69 90 top
R94  4.7K  [0603-RES]  187.71,27.69 90 top
R95  10K  [0603-RES]  190.25,27.69 90 top
R96  10K  [0603-RES]  192.79,27.69 270 top
R97  4.7K  [0603-RES]  11.94,43.43 90 top
R98  4.7K  [0603-RES]  14.48,43.43 90 top
R99  10K  [0603-RES]  17.02,43.43 90 top
R100  10K  [0603-RES]  19.56,43.43 270 top
R101  4.7K  [0603-RES]  27.69,43.43 90 top
R102  4.7K  [0603-RES]  30.23,43.43 90 top
R103  10K  [0603-RES]  32.77,43.43 90 top
R104  10K  [0603-RES]  35.31,43.43 270 top
R105  4.7K  [0603-RES]  43.43,43.43 90 top
R106  4.7K  [0603-RES]  45.97,43.43 90 top
R107  10K  [0603-RES]  48.51,43.43 90 top
R108  10K  [0603-RES]  51.05,43.43 270 top
R109  4.7K  [0603-RES]  59.18,43.43 90 top
R110  4.7K  [0603-RES]  61.72,43.43 90 top
R111  10K  [0603-RES]  64.26,43.43 90 top
R112  10K  [0603-RES]  66.8,43.43 270 top
R113  4.7K  [0603-RES]  74.93,43.43 90 top
R114  4.7K  [0603-RES]  77.47,43.43 90 top
R115  10K  [0603-RES]  80.01,43.43 90 top
R116  10K  [0603-RES]  82.55,43.43 270 top
R117  4.7K  [0603-RES]  90.68,43.43 90 top
R118  4.7K  [0603-RES]  93.22,43.43 90 top
R119  10K  [0603-RES]  95.76,43.43 90 top
R120  10K  [0603-RES]  98.3,43.43 270 top
R121  4.7K  [0603-RES]  106.43,43.43 90 top
R122  4.7K  [0603-RES]  108.97,43.43 90 top
R123  10K  [0603-RES]  111.51,43.43 90 top
R124  10K  [0603-RES]  114.05,43.43 270 top
R125  4.7K  [0603-RES]  122.17,43.43 90 top
R126  4.7K  [0603-RES]  124.71,43.43 90 top
R127  10K  [0603-RES]  127.25,43.43 90 top
R128  10K  [0603-RES]  129.79,43.43 270 top
R129  4.7K  [0603-RES]  137.92,43.43 90 top
R130  4.7K  [0603-RES]  140.46,43.43 90 top
R131  10K  [0603-RES]  143,43.43 90 top
R132  10K  [0603-RES]  145.54,43.43 270 top
R133  4.7K  [0603-RES]  153.67,43.43 90 top
R134  4.7K  [0603-RES]  156.21,43.43 90 top
R135  10K  [0603-RES]  158.75,43.43 90 top
R136  10K  [0603-RES]  161.29,43.43 270 top
R137  4.7K  [0603-RES]  169.42,43.43 90 top
R138  4.7K  [0603-RES]  171.96,43.43 90 top
R139  10K  [0603-RES]  174.5,43.43 90 top
R140  10K  [0603-RES]  177.04,43.43 270 top
R141  4.7K  [0603-RES]  185.17,43.43 90 top
R142  4.7K  [0603-RES]  187.71,43.43 90 top
R143  10K  [0603-RES]  190.25,43.43 90 top
R144  10K  [0603-RES]  192.79,43.43 270 top
R145  4.7K  [0603-RES]  11.94,59.18 90 top